# Altium PCB 模拟量.PcbDoc (part 1 of 2)
Units mm, origin at the board's own origin, x right, y up, seen from the top; angles counter-clockwise.
Board outline 122.4 x 87.4 mm, 2 copper layers (Top Layer, Bottom Layer); 86 components, 81 nets, 307 pads, 23 vias.
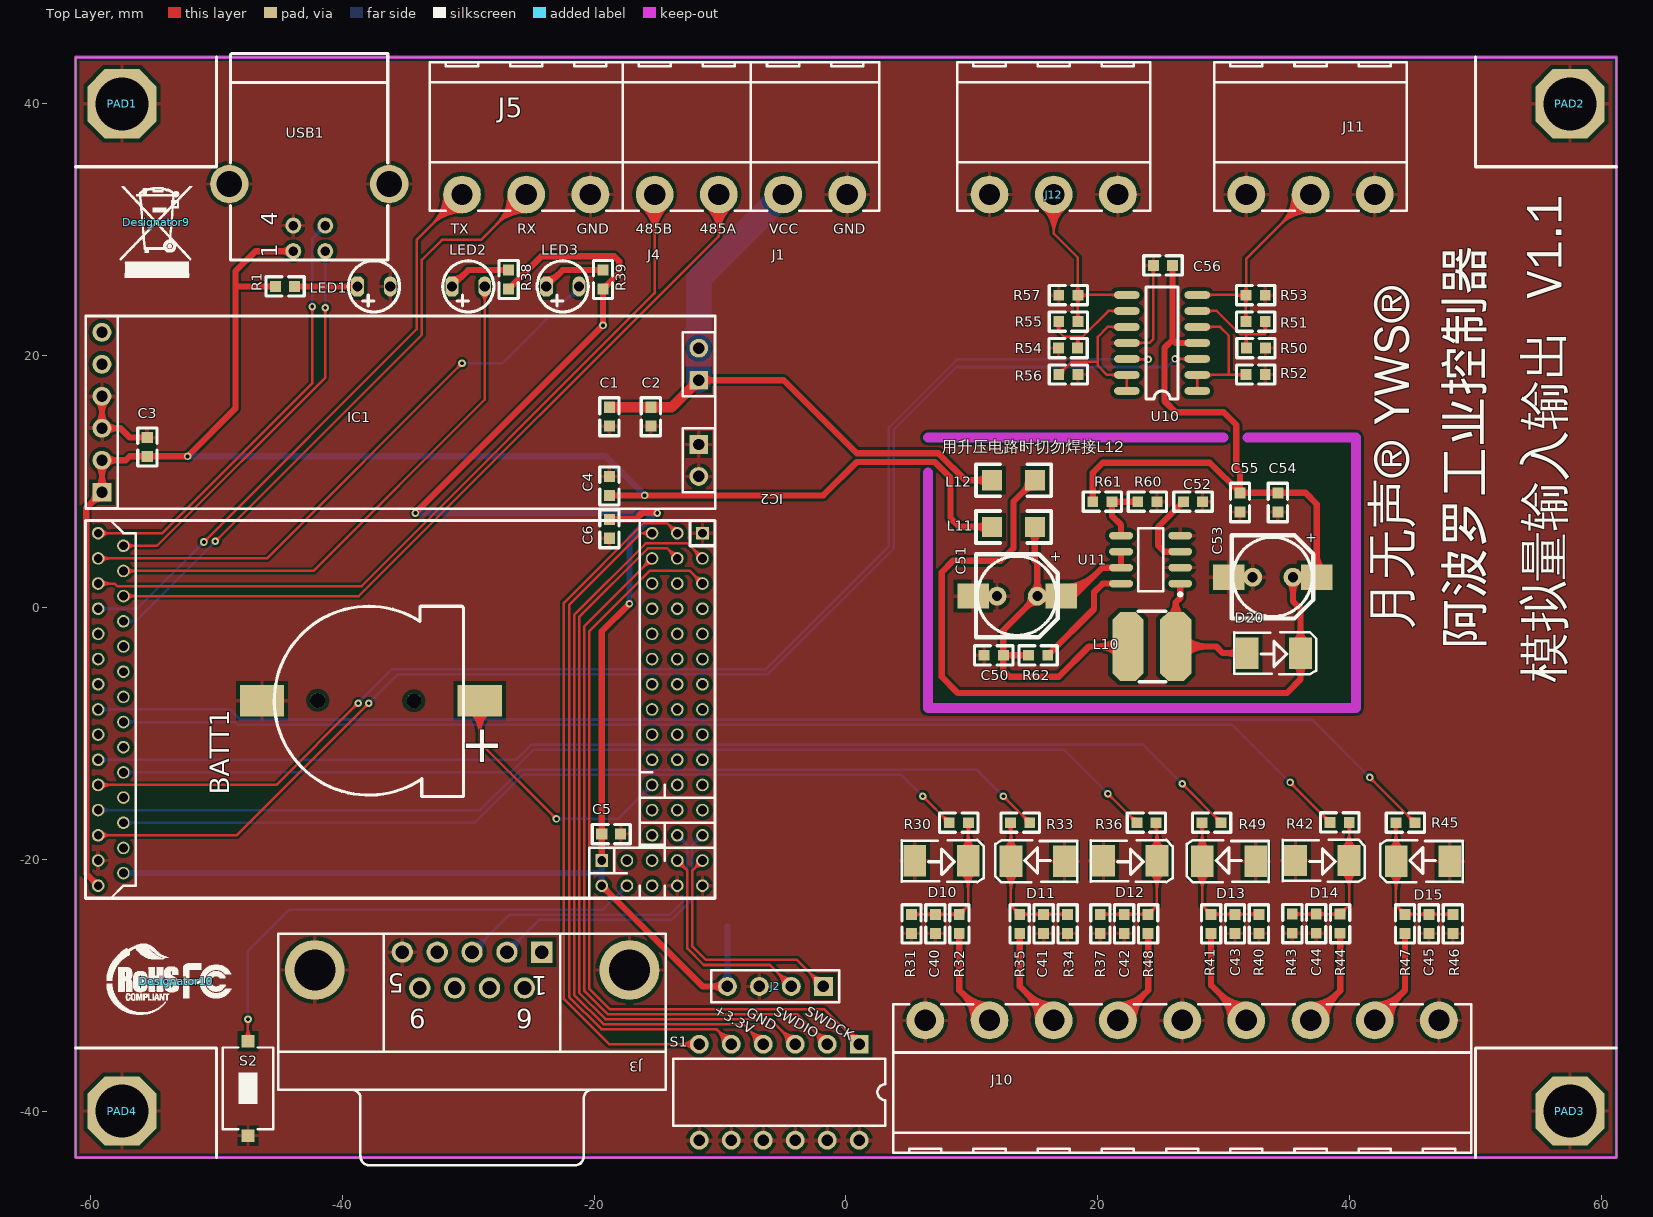
[diagram p0: Top Layer view]
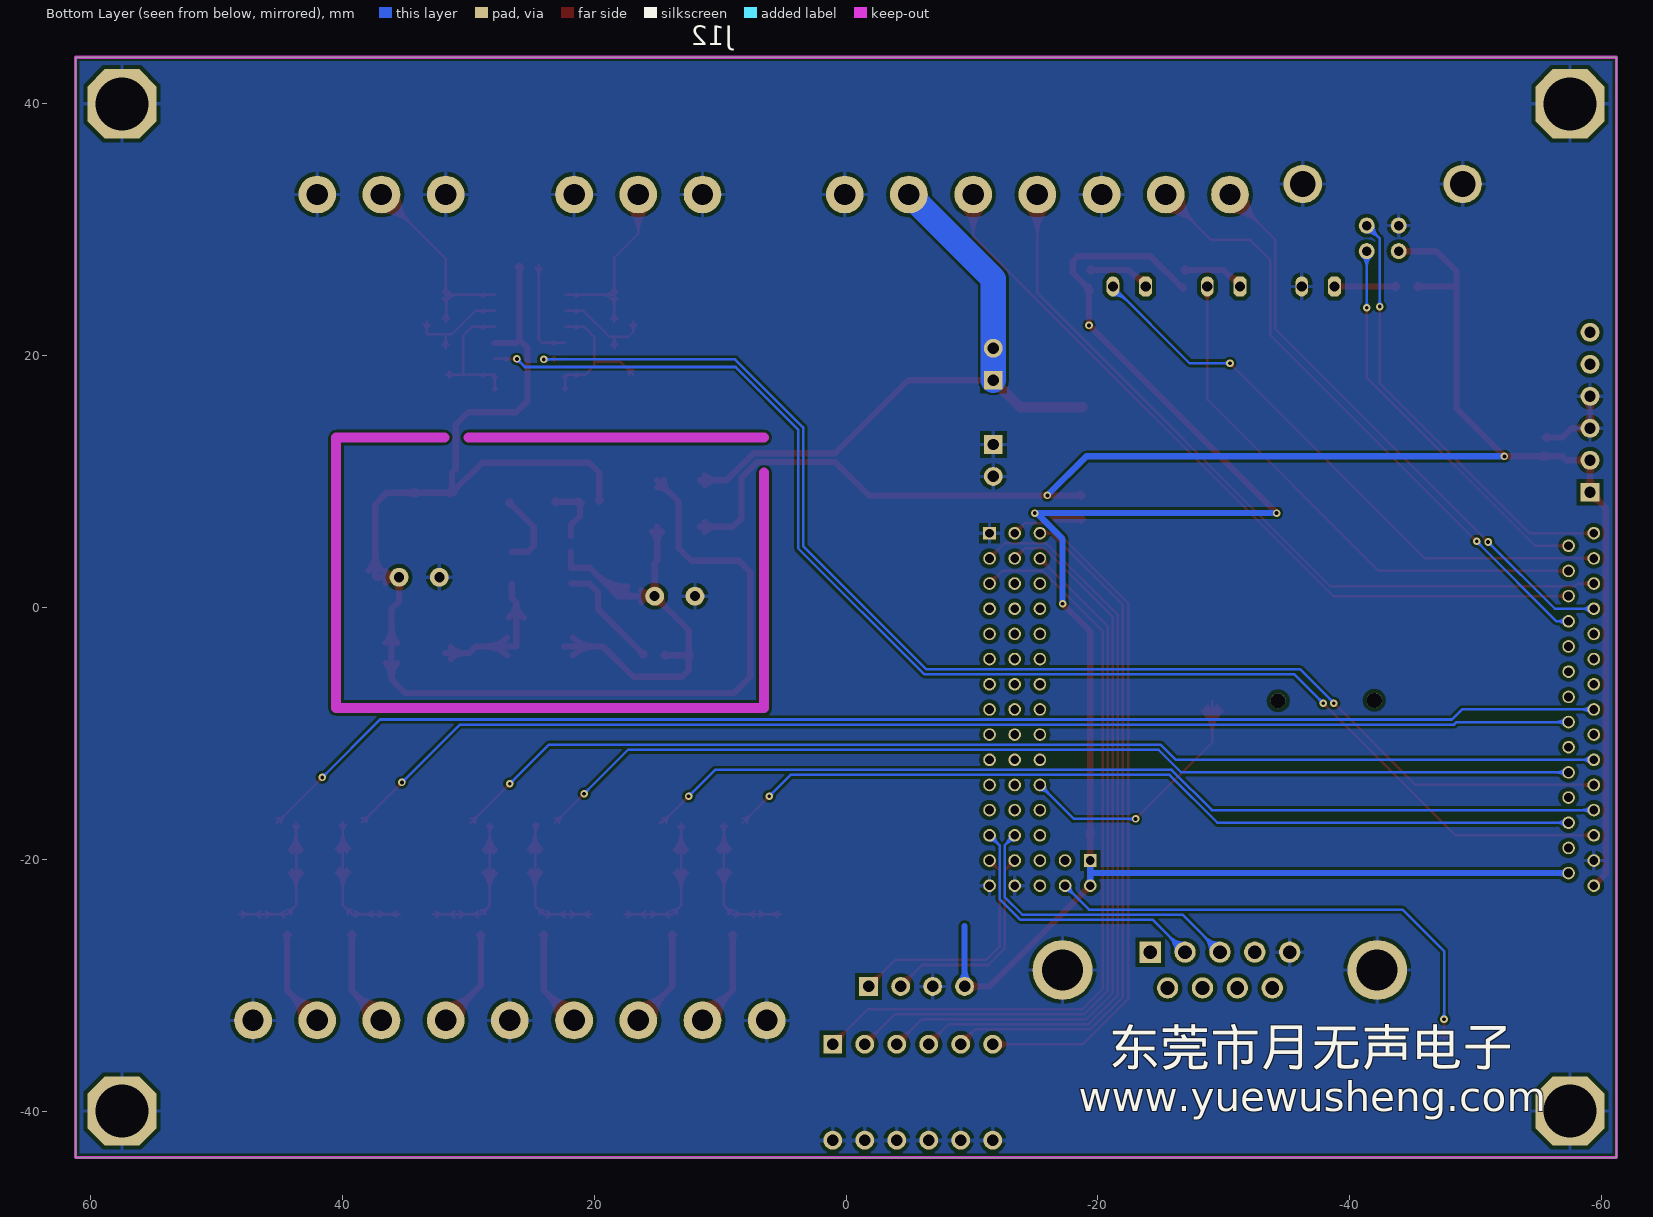
[diagram p1: Bottom Layer view, seen from below]

## Layer stack, top to bottom
Top Layer: signal copper 0.0356
Dielectric: dielectric 0.32, FR-4, Dk 4.8
Bottom Layer: signal copper 0.0356

## Board outline
-61.2,-43.7 61.2,-43.7 61.2,43.7 -61.2,43.7

## Design rules (kind name [scope] priority, off if disabled: settings)
Clearance [(InPadClass('All Pads')) vs InPolygon] p1: gap=0.3
Clearance Clearance_1 [All] p2: gap=0.2
ComponentClearance [All] p1 off: gap=0.254 collisioncheckmode=3 verticalgap=0.254 showdistances=FALSE
PlaneConnect [All] p1: planeconnectstyle=Relief reliefexpansion=0 reliefentries=4 reliefconductorwidth=0.3 reliefairgap=0.508
PolygonConnect PolygonConnect_1 [All vs IsComponentPad] p1: connectstyle=Relief reliefconductorwidth=0.3 reliefentries=4 polygonreliefangle="90 Angle" airgapwidth=0.3
PolygonConnect [All] p2: connectstyle=Direct reliefconductorwidth=0.3 reliefentries=4 polygonreliefangle="90 Angle" airgapwidth=0.3
RoomDefinition 模拟量 [InComponentClass('模拟量')] p1: confinementstyle=ConfineIn formatcopy=TRUE lockcomponents=FALSE outline -12,23.5 -12,28 3.5,28 3.5,46.6 62,46.6 62,-46.8 3.5,-46.8 3.5,-28 -12,-28 -12,-23.5 -9,-23.5 -9,23.5
RoomDefinition 公共电路 [InComponentClass('公共电路')] p2: confinementstyle=ConfineIn formatcopy=TRUE lockcomponents=FALSE outline -62,-44.5 3.5,-44.5 3.5,-43.7 61.2,-43.7 61.2,43.7 50,43.7 50,35 61.2,35 61.2,-35 50,-35 50,-43.7 3.5,-43.7 3.5,-28 -12,-28 -12,-23.5 -9.5,-23.5 -9.5,23.5 -12,23.5 -12,28 3.5,28 3.5,44.5 -62,44.5
RoutingVias [All] p1: holewidth=0.3 width=0.6 viastyle="Through Hole" minholewidth=0.3 minwidth=0.6 maxholewidth=0.3 maxwidth=0.6
SolderMaskExpansion [All] p1: expansion=0.102
Width [All] p1: maxlimit=2 minlimit=0.16 preferedwidth=0.2 minimp=50.000000 maximp=50.000000 favimp=50.000000
26 further rules are at their usual default settings.

## Classes and differential pairs
component class 公共电路: BATT1 C1 C2 C3 C4 C5 C6 Designator9 Designator10 IC1 IC2 J1 J2 J3 J4 J5 LED1 LED2 LED3 PAD1 PAD2 PAD3 PAD4 R1 R38 R39 S1 S2 usb1
component class 模拟量: C40 C41 C42 C43 C44 C45 C50 C51 C52 C53 C54 C55 C56 D10 D11 D12 D13 D14 D15 D20 J10 J11 J12 L10 L11 L12 R30 R31 R32 R33 R34 R35 R36 R37 R40 R41 R42 R43 R44 R45 R46 R47 R48 R49 R50 R51 R52 R53 R54 R55 R56 R57 R60 R61 R62 U10 U11

## Components (designator, comment, footprint, x,y, rotation, side; value= is the part's Value field where it differs from the comment)
BATT1 "XH414H" MINI-BAT -29.1,-7.4 r180 top
C1 "104" 0603A#1 -18.8,15.9 r270 top
C2 "104" 0603A#1 -15.5,15.9 r270 top
C3 "104" 0603A#1 -55.5,12 r90 top
C4 "104" 0603A#1 -18.8,8.9 r90 top
C5 "104" 0603A#1 -19.4,-18 r0 top
C6 "104" 0603A#1 -18.8,7 r270 top
C40 "104" 0603A#2 7.1,-25.9 r90 top
C41 "104" 0603A#2 15.7,-25.9 r90 top
C42 "104" 0603A#2 22.1,-25.9 r90 top
C43 "104" 0603A#2 30.9,-25.9 r90 top
C44 "104" 0603A#2 37.35,-25.875 r90 top
C45 "104" 0603A#2 46.3,-25.9 r90 top
C50 "104" 0603A#2 12.5,-3.8 r180 top
C51 "680UF/50V" 电解电容 13.6,0.9 r0 top
C52 "221" 0603A#2 26.8,8.4 r0 top
C53 "680UF/50V" 电解电容 33.9,2.4 r0 top
C54 "104" 0603A#2 34.3,9.1 r270 top
C55 "104" 0603A#2 31.3,9.1 r270 top
C56 "104" 0603A#2 25.942,27.168 r180 top
D10 "3.6V" 贴片二极管 11,-20.2 r0 top
D11 "5.6V" 贴片二极管 11.8,-20.1 r180 top
D12 "3.6V" 贴片二极管 26,-20.2 r0 top
D13 "3.6V" 贴片二极管 27,-20.1 r180 top
D14 "3.6V" 贴片二极管 41.25,-20.175 r0 top
D15 "3.6V" 贴片二极管 42.4,-20.1 r180 top
D20 "IN5824" 贴片二极管 37.4,-3.7 r0 top
Designator9 "" HS -54.8,30.6 r0 top
Designator10 "" fc -53.2,-29.7 r0 top
IC1 "扩展模块电源板" 扩展模块电源板 -35.4,15.5 r180 top
IC2 "核心板" 核心板 -10.4,6.9 r180 top
J1 "CON2" CON2-5.1卧 0.1,32.8 r0 top
J2 "CON4" HDR1X4 -1.8,-30.1 r180 top
J3 "D Connector 9" DSUB1.385-2H9 -29.7,-38.3 r180 top
J4 "CON2" CON2-5.1卧 -10.1,32.8 r0 top
J5 "CON3" CON3-5.1卧 -20.3,32.8 r0 top
J10 "CON9" CON9-5.1卧 6.3,-32.8 r180 top
J11 "CON3" CON3-5.1卧 42,32.8 r0 top
J12 "CON3" CON3-5.1卧 21.6,32.8 r0 top
L10 "100UH" SMD-50 24.3,-3.1 r180 top
L11 "100UH" 1206C 11.6,6.4 r0 top
L12 "100UH" 1206C 11.6,10.1 r0 top
LED1 "LED" LED2.5 -37.5,25.5 r180 top
LED2 "LED" LED2.5 -30,25.5 r180 top
LED3 "LED" LED2.5 -22.5,25.5 r180 top
PAD1 "PAD" PAD -57.5,40 r0 top
PAD2 "PAD" PAD 57.5,40 r0 top
PAD3 "PAD" PAD 57.5,-40 r0 top
PAD4 "PAD" PAD -57.5,-40 r0 top
R1 "300" 0603A#1 -45.3,25.5 r0 top
R30 "100R" 0603A#2 8.2,-17.1 r0 top
R31 "13K %1" 0603A#2 5.2,-25.9 r90 top
R32 "91K 1%" 0603A#2 9,-25.9 r90 top
R33 "100R" 0603A#2 14.6,-17.1 r180 top
R34 "13K %1" 0603A#2 17.6,-25.9 r90 top
R35 "91K 1%" 0603A#2 13.8,-25.9 r90 top
R36 "100R" 0603A#2 23.1,-17.1 r0 top
R37 "13K %1" 0603A#2 20.2,-25.9 r90 top
R38 "160" 0603A#1 -26.8,25.3 r90 top
R39 "160" 0603A#1 -19.3,25.3 r90 top
R40 "13K %1" 0603A#2 32.8,-25.9 r90 top
R41 "91K 1%" 0603A#2 29,-25.9 r90 top
R42 "100R" 0603A#2 38.45,-17.075 r0 top
R43 "13K %1" 0603A#2 35.45,-25.875 r90 top
R44 "91K 1%" 0603A#2 39.25,-25.875 r90 top
R45 "100R" 0603A#2 45.2,-17.1 r180 top
R46 "13K %1" 0603A#2 48.2,-25.9 r90 top
R47 "91K 1%" 0603A#2 44.4,-25.9 r90 top
R48 "91K 1%" 0603A#2 24,-25.9 r90 top
R49 "100R" 0603A#2 29.8,-17.1 r180 top
R50 "13K %1" 0603A#2 31.8,20.6 r0 top
R51 "91K %1" 0603A#2 33.3,22.7 r180 top
R52 "1K" 0603A#2 31.776,18.5 r0 top
R53 "1K" 0603A#2 33.3,24.8 r180 top
R54 "13K %1" 0603A#2 18.4,20.6 r180 top
R55 "91K %1" 0603A#2 16.9,22.7 r0 top
R56 "1K" 0603A#2 16.9,18.5 r0 top
R57 "1K" 0603A#2 16.9,24.8 r0 top
R60 "2.2k" 0603A#2 24.7,8.4 r180 top
R61 "51k" 0603A#2 19.6,8.4 r0 top
R62 "180R" 0603A#2 14.5,-3.8 r0 top
S1 "SW DIP-6" DIP-12/SW -5.3,-38.5 r180 top
S2 "RESRT" SW-PB2 -47.5,-38.2 r270 top
U10 "LM324" SO-14 25.242,20.668 r180 top
U11 "34063" SO8_L 24.2,3.8 r180 top
USB1 "USB" USB-B3 -43.9,28.3 r90 top

## Footprints (in the part's own frame and the unit in brackets; to place one, negate y for a bottom-side part, rotate by r counter-clockwise, add the part's x,y. Pads: shape width x height; smd on the part's side, far side on the other; paste and mask are expansions set on the pad)
0603A#1 [mm]
  rect 0.88x0.88 smd: 1(0,0) 2(1.5,0)
  silkscreen extent -0.76,-0.76 2.26,0.76
0603A#2 [mm]
  rect 0.864x0.864 smd: 1(0,0) 2(1.524,0)
  silkscreen extent -0.76,-0.76 2.29,0.76
1206C [mm]
  rect 1.6x1.6 smd: 1(0,0) 2(3.4,0)
  silkscreen extent -1.27,-1.27 4.7,1.27
CON2-5.1卧 [mm]
  round 3 hole 1.7: 1(0,0) 2(-5.1,0)
  silkscreen extent -7.65,-1.28 2.55,10.5
CON3-5.1卧 [mm]
  round 3 hole 1.7: 1(0,0) 2(-5.1,0) 3(-10.2,0)
  silkscreen extent -12.75,-1.28 2.55,10.5
CON9-5.1卧 [mm]
  round 3 hole 1.7: 1(0,0) 2(-5.1,0) 3(-10.2,0) 4(-15.3,0) 5(-20.4,0) 6(-25.5,0) 7(-30.6,0) 8(-35.7,0) 9(-40.8,0)
  silkscreen extent -43.35,-1.28 2.55,10.5
DIP-12/SW [mm] "DIP Switch; 12 Leads"
  rect 1.5x1.5 hole 0.9: 1(-6.35,-3.81)
  round 1.5 hole 0.9: 2(-3.81,-3.81) 3(-1.27,-3.81) 4(1.27,-3.81) 5(3.81,-3.81) 6(6.35,-3.81) 7(6.35,3.81) 8(3.81,3.81) 9(1.27,3.81) 10(-1.27,3.81) 11(-3.81,3.81) 12(-6.35,3.81)
  silkscreen extent -8.43,-2.65 8.41,2.65
DSUB1.385-2H9 [mm] "Connector; D Subminiature; 9 Position; Right Angle; Pitch 1.385 mm"
  rect 1.69x1.69 hole 1.09: 1(-5.54,-10.92)
  round 1.69 hole 1.09: 2(-2.77,-10.92) 3(0,-10.92) 4(2.77,-10.92) 5(5.54,-10.92) 6(-4.155,-8.08) 7(-1.385,-8.08) 8(1.385,-8.08) 9(4.155,-8.08)
  round 4.76 hole 3.26: 10(-12.495,-9.5) 11(12.495,-9.5)
  silkscreen extent -15.4,-12.4 15.4,6
fc [mm]
  silkscreen extent -5.53,-2.62 4.36,3
HDR1X4 [mm] "Connector; Header; 4 Position"
  rect 1.5x1.5 hole 0.9: 1(0,0)
  round 1.5 hole 0.9: 2(2.54,0) 3(5.08,0) 4(7.62,0)
  silkscreen extent -1.27,-1.27 8.89,1.27
HS [mm]
  silkscreen extent -2.87,-4.39 2.87,2.87
LED2.5 [mil]
  oct 40x63 hole 32: A(51.18,0)
  oval 40x63 hole 32: K(-51.18,0)
  silkscreen extent -80,-80 80,80
MINI-BAT [mm]
  round 1.2 hole 1.2: 0(5.226,0.017) 0(12.863,-0.02)
  rect 3.5x2.5 smd: 1(-0.01,0.007) 2(17.29,0.007)
  silkscreen extent 1.29,-7.49 16.31,7.61
PAD [mm]
  oct 5.5x5.5 hole 4.2: 1(0,0)
SMD-50 [mm]
  oct 2.5x5.5 smd: 1(-1.9,0) 2(1.9,0)
  silkscreen extent -1.1,-2.8 1.1,2.8
SO8_L [mm] "SOIC, 8-Leads, Body 4.9x3.9mm, Pitch 1.27mm, IPC High Density"
  oval 1.9x0.6 smd: 1(-2.35,1.905) 2(-2.35,0.635) 3(-2.35,-0.635) 4(-2.35,-1.905) 5(2.35,-1.905) 6(2.35,-0.635) 7(2.35,0.635) 8(2.35,1.905)
  silkscreen extent -2.48,-2.5 1,2.88, body extent -2,-2.5 2,2.5, height 1.75
SO-14 [mil]
  oval 80x24 smd: 1(-104.65,136.54) 2(-104.65,86.54) 3(-104.65,36.54) 4(-104.65,-13.46) 5(-104.65,-63.46) 6(-104.65,-113.46) 7(-104.65,-163.46) 8(115.35,-163.46) 9(115.35,-113.46) 10(115.35,-63.46) 11(115.35,-13.46) 12(115.35,36.54) 13(115.35,86.54) 14(115.35,136.54)
  silkscreen extent -45,-188 55,162
SW-PB2 [mm]
  rect 1x1 smd: 1(-3.75,0) 2(3.75,0)
  silkscreen extent -3.25,-2 3.25,2
USB-B3 [mil]
  round 50 hole 30: 1(0,0) 2(0,-100) 3(80,-100) 4(80,0)
  round 120 hole 80: 5(210,200) 6(210,-300)
  silkscreen extent -28,-295 618,197
扩展模块电源板 [mm]
  round 1.5 hole 0.9: 1(-23.7,-5.09) 2(-23.7,5.09) 3(23.7,3.81) 4(23.7,-1.27) 4(23.7,1.27) 5(23.7,-6.35) 5(23.7,-3.81)
  rect 1.5x1.5 hole 0.9: 1(-23.7,-2.55) 2(-23.7,2.55) 3(23.7,6.35)
  silkscreen extent -25,-7.65 25,7.65
核心板 [mm]
  rect 1x1 hole 0.7: 1(1,1) 40(9,27)
  round 1 hole 0.7: 2(3,1) 3(5,1) 4(1,3) 5(3,3) 6(5,3) 7(1,5) 8(3,5) 9(5,5) 10(1,7) 11(3,7) 12(5,7) 13(1,9) 14(3,9) 15(5,9) 16(1,11) 17(3,11) 18(5,11) 19(1,13) 20(3,13) 21(5,13) 22(1,15) 23(3,15) 24(5,15) 25(1,17) 26(3,17) 27(5,17) 28(1,19) 29(3,19) 30(5,19) 31(1,21) 32(3,21) 33(5,21) 34(1,23) 35(3,23) 36(5,23) 37(1,25) 38(3,25) 39(5,25) 41(9,29) 42(7,27) 43(7,29) 44(5,27) 45(5,29) 46(3,27) 47(3,29) 48(1,27) 49(1,29) 50(49,29) 51(47,28) 52(49,27) 53(47,26) 54(49,25) 55(47,24) 56(49,23) 57(47,22) 58(49,21) 59(47,20) 60(49,19) 61(47,18) 62(49,17) 63(47,16) 64(49,15) 65(47,14) 66(49,13) 67(47,12) 68(49,11) 69(47,10) 70(49,9) 71(47,8) 72(49,7) 73(47,6) 74(49,5) 75(47,4) 76(49,3) 77(47,2) 78(49,1)
  silkscreen extent 0,0 50,30
电解电容 [mm]
  round 1.5 hole 0.8: 1(1.6,0) 2(-1.6,0)
  rect 2.5x2 smd: 1(3.5,0) 2(-3.5,0)
  silkscreen extent -3.27,-3.27 3.22,3.33
贴片二极管 [mm]
  rect 1.8x2.5 smd: A(-5.55,0.075) K(-1.3,0.075)
  silkscreen extent -6.58,-1.61 -0.05,1.73

## Part data
BATT1: library part Battery
C1 C2 C3 C4 C5 C6 C50 C52 C54 C55 C56: library part CAP, "Capacitor"
C40 C41 C42 C43 C44 C45: library part Cap_1, "Capacitor"
C51 C53: library part "CAPACITOR POL", "Capacitor"
D10 D11 D12 D13 D14 D15: library part 稳压二极管
D20: library part 肖特基二极管
Designator9 Designator10: library part PAD
J3: "Receptacle Assembly, 9 Position, Right Angle"
L10 L11 L12: library part L1
R1 R38 R39: library part RES2
R30 R31 R32 R33 R34 R35 R36 R37 R40 R41 R42 R43 R44 R45 R46 R47 R48 R49: library part Res2, "Resistor"
R50 R51 R52 R53 R54 R55 R56 R57 R60 R61 R62: library part R
S1: "DIP Switch, 6 Position, SPST"
S2: library part SW-PB
USB1: library part "HEADER 3X2"

## Via types
v1: diameter 0.6, hole 0.3, Top Layer to Bottom Layer, 23 vias

## Nets (pads, with @x,y where several pads share a name; then routed paths per layer and width w, separated by ;. In a path a pad name is that pad's centre, name@x,y a point inside that pad or via, vN(x,y) a via of type N, cw(c..) or ccw(c..) an arc to the next point about the centre after c; other vN are vias at no path point)
485A: IC2.73 J4.1 | length 80
  Top Layer w0.2: IC2.73@-57.4,0.9 -38.7,0.9 -10.1,29.5 ; IC2.73@-57.117,0.617 cw(c-56.434,-0.066) -56.434,0.9 cw(c-56.434,1.866) IC2.73@-57.117,1.183 ; J4.1@-11.073,31.793 cw(c-13.289,29.5) -10.1,29.5 ; J4.1@-10.934,31.937 cw(c-12.833,29.972) -10.1,29.972 cw(c-7.367,29.972) J4.1@-9.266,31.937 ; J4.1@-10.795,32.081 cw(c-12.378,30.443) -10.1,30.443 cw(c-7.822,30.443) J4.1@-9.405,32.081 ; J4.1@-10.656,32.225 cw(c-11.922,30.914) -10.1,30.914 cw(c-8.278,30.914) J4.1@-9.544,32.225 ; J4.1@-10.1,32.8 -10.1,29.5 ; J4.1@-9.127,31.793 ccw(c-6.911,29.5) -10.1,29.5
485B: IC2.74 J4.2 | length 80
  Top Layer w0.2: IC2.74@-59.4,1.9 -58.097,1.9 -57.897,1.7 -38.466,1.7 -15.2,24.966 J4.2@-15.2,32.8 ; IC2.74@-59.117,1.617 cw(c-58.434,0.934) -58.434,1.9 cw(c-58.434,2.866) IC2.74@-59.117,2.183 ; J4.2@-16.19,31.81 cw(c-18.58,29.42) -15.2,29.42 cw(c-11.82,29.42) J4.2@-14.21,31.81 ; J4.2@-16.049,31.951 cw(c-18.097,29.903) -15.2,29.903 cw(c-12.303,29.903) J4.2@-14.351,31.951 ; J4.2@-15.907,32.093 cw(c-17.614,30.386) -15.2,30.386 cw(c-12.786,30.386) J4.2@-14.493,32.093 ; J4.2@-15.766,32.234 cw(c-17.131,30.869) -15.2,30.869 cw(c-13.269,30.869) J4.2@-14.634,32.234
+3.3V: C5.1 C6.1 IC2.40 IC2.41 IC2.51 J2.4 R38.1 R39.1 | length 160
  Top Layer w0.5: v1(-34.2,7.5) v1(-19.3,22.4) R39.1@-19.3,25.3 -19.284,25.3 -18,26.584 -18,27.5 -18.4,27.9 -24.184,27.9 -26.784,25.3 R38.1@-26.8,25.3 ; R38.1@-26.8,25.49 ccw(c-26.8,25.988) R38.1@-26.448,25.636 ; IC2.40@-19.577,-19.923 ccw(c-20.004,-19.496) -19.4,-19.496 ccw(c-18.796,-19.496) IC2.40@-19.223,-19.923 ; C5.1@-19.534,-18.134 cw(c-19.859,-18.459) -19.4,-18.459 cw(c-18.941,-18.459) C5.1@-19.266,-18.134 ; C5.1@-19.534,-17.866 ccw(c-19.859,-17.541) -19.4,-17.541 ccw(c-18.941,-17.541) C5.1@-19.266,-17.866 ; R39.1@-19.434,25.166 cw(c-19.759,24.841) -19.3,24.841 cw(c-18.841,24.841) R39.1@-19.166,25.166 ; IC2.41@-19.4,-22.35 cw(c-19.4,-22.954) -18.973,-22.527 cw(c-18.546,-22.1) IC2.41@-19.15,-22.1 ; IC2.41@-19.4,-22.1 -11.4,-30.1 J2.4@-9.42,-30.1 ; IC2.40@-19.4,-20.1 C5.1@-19.4,-18 -19.4,-1.9 v1(-17.2,0.3) ; R39.1@-19.3,25.49 ccw(c-19.3,25.988) R39.1@-18.948,25.636 ; C6.1@-18.8,7 -16.7,7 -16.2,7.5 v1(-15,7.5) ; C6.1@-18.666,6.866 cw(c-18.341,6.541) -18.341,7 cw(c-18.341,7.459) C6.1@-18.666,7.134 ; J2.4@-9.774,-30.454 ccw(c-10.627,-31.307) -10.627,-30.1 ccw(c-10.627,-28.893) J2.4@-9.774,-29.746
  Bottom Layer w0.5: IC2.51@-57.4,-21.1 -19.4,-21.1 ; IC2.51@-57.223,-21.277 cw(c-56.796,-21.704) -56.796,-21.1 cw(c-56.796,-20.496) IC2.51@-57.223,-20.923 ; v1(-34.2,7.5) v1@-15.144,7.5 ; IC2.41@-19.577,-21.923 ccw(c-20.004,-21.496) -19.4,-21.496 ccw(c-18.796,-21.496) IC2.41@-19.223,-21.923 ; IC2.40@-19.577,-20.277 cw(c-20.004,-20.704) -19.4,-20.704 cw(c-18.796,-20.704) IC2.40@-19.223,-20.277 ; IC2.41@-19.4,-22.1 -19.4,-21.1 ; IC2.40@-19.4,-20.1 -19.4,-21.1 ; v1(-17.2,0.3) -17.2,5.444 v1@-15.144,7.5 ; -15.33,7.313 cw(c-15,6.983) v1@-15,7.45 ; v1(-15,7.5) v1@-15.144,7.5 ; J2.4@-9.774,-29.746 ccw(c-10.627,-28.893) -9.42,-28.893 ccw(c-8.213,-28.893) J2.4@-9.066,-29.746 ; J2.4@-9.42,-30.1 -9.42,-25.3
+5V: C3.1 C4.1 IC1.3 IC2.50 L11.1 R1.1 USB1.1 | length 154.4
  Top Layer w0.5: IC2.50@-59.65,-22.1 ccw(c-60.254,-22.1) -59.827,-21.673 ccw(c-59.4,-21.246) IC2.50@-59.4,-21.85 ; IC1.3@-59.6,9.15 cw(c-60.807,9.15) -59.954,8.296 cw(c-59.1,7.443) IC1.3@-59.1,8.65 ; IC1.3@-59.454,9.504 ccw(c-60.307,10.357) -59.1,10.357 ccw(c-57.893,10.357) IC1.3@-58.746,9.504 ; IC1.3@-59.454,11.336 cw(c-60.307,10.483) -59.1,10.483 cw(c-57.893,10.483) -58.746,11.336 cw(c-57.893,10.483) -57.893,11.69 cw(c-57.893,12.897) IC1.3@-58.746,12.044 ; IC2.50@-59.4,-22.1 -60.35,-21.15 -60.35,7.9 IC1.3@-59.1,9.15 IC1.3@-59.1,11.69 -57.21,11.69 -56.9,12 C3.1@-55.5,12 v1(-52.3,12) -48.5,15.8 -48.5,25.5 ; C3.1@-55.634,11.866 ccw(c-55.959,11.541) -55.959,12 ccw(c-55.959,12.459) C3.1@-55.634,12.134 ; C3.1@-55.366,11.866 cw(c-55.041,11.541) -55.041,12 cw(c-55.041,12.459) C3.1@-55.366,12.134 ; R1.1@-45.434,25.366 ccw(c-45.759,25.041) -45.759,25.5 ccw(c-45.759,25.959) R1.1@-45.434,25.634 ; R1.1@-45.3,25.5 -48.5,25.5 ; USB1.1@-44.172,28.028 ccw(c-44.829,27.371) -44.829,28.3 ccw(c-44.829,29.229) USB1.1@-44.172,28.572 ; USB1.1@-43.9,28.3 -46.9,28.3 -48.5,26.7 -48.5,25.5 ; C4.1@-18.8,8.9 v1(-16,8.9) -1.8,8.9 0.85,11.55 7.05,11.55 8.3,10.3 8.3,7.1 9,6.4 L11.1@11.6,6.4 ; C4.1@-18.666,8.766 cw(c-18.341,8.441) -18.341,8.9 cw(c-18.341,9.359) C4.1@-18.666,9.034 ; L11.1@11.211,6.011 ccw(c10.272,5.072) 10.272,6.4 ccw(c10.272,7.728) L11.1@11.211,6.789
  Bottom Layer w0.5: v1(-52.3,12) -19.1,12 v1(-16,8.9)
+30V: C53.1 C54.1 C55.1 C56.1 D20.K L12.2 R61.1 U10.4 | length 134.3
  Top Layer w0.5: L12.2@14.45,10.1 cw(c13.122,10.1) 14.061,9.161 cw(c15,8.222) L12.2@15,9.55 ; L12.2@15,10.1 13.3,8.4 13.3,4.7 12.3,3.7 8.5,3.7 7.6,2.8 7.6,-5.5 8.9,-6.8 35,-6.8 36.1,-5.7 D20.K@36.1,-3.625 36.1,-0.1 35.5,0.5 C53.1@35.5,2.4 ; R61.1@19.471,8.529 ccw(c19.161,8.839) 19.6,8.839 ccw(c20.039,8.839) R61.1@19.729,8.529 ; R61.1@19.6,8.4 19.6,10.7 20.4,11.5 28.9,11.5 C55.1@31.3,9.1 ; C56.1@25.813,27.039 cw(c25.503,26.729) 25.942,26.729 cw(c26.381,26.729) C56.1@26.071,27.039 ; C56.1@25.942,27.168 25.942,21.258 ; U10.4@27.9,21.01 26.19,21.01 25.942,21.258 ; C55.1@31.118,9.1 ccw(c30.679,9.1) 30.99,9.41 ccw(c31.3,9.721) C55.1@31.3,9.282 ; C55.1@31.171,9.229 ccw(c30.861,9.539) 31.3,9.539 ccw(c31.739,9.539) 31.429,9.229 ccw(c31.739,9.539) 31.739,9.1 ccw(c31.739,8.661) C55.1@31.429,8.971 ; C54.1@34.171,8.971 ccw(c33.861,8.661) 33.861,9.1 ccw(c33.861,9.539) C54.1@34.171,9.229 ; C54.1@34.429,8.971 cw(c34.739,8.661) 34.739,9.1 cw(c34.739,9.539) C54.1@34.429,9.229 ; C53.1@35.146,2.046 cw(c34.293,1.193) 35.5,1.193 cw(c36.707,1.193) 35.854,2.046 cw(c36.707,1.193) 36.707,2.4 cw(c36.707,3.607) C53.1@35.854,2.754 ; D20.K@35.64,-4.435 cw(c34.531,-5.544) 36.1,-5.544 cw(c37.669,-5.544) D20.K@36.56,-4.435 ; D20.K@35.64,-2.815 ccw(c34.531,-1.706) 36.1,-1.706 ccw(c37.669,-1.706) D20.K@36.56,-2.815 ; C53.1@36.585,1.907 ccw(c35.5,0.96) C53.1@35.5,2.4 ; C53.1@36.585,2.893 cw(c35.5,3.84) C53.1@35.5,2.4 ; C53.1@36.87,2.93 ccw(c35.589,4.211) 37.4,4.211 ccw(c39.211,4.211) C53.1@37.93,2.93 ; 25.942,21.258 25.3,20.616 25.3,16.4 26.2,15.5 30,15.5 31,14.5 31,11 31.3,10.7 C55.1@31.3,9.1 ; C55.1@31.3,9.1 C54.1@34.3,9.1 36.5,9.1 37.4,8.2 C53.1@37.4,2.4 C53.1@35.5,2.4
A_IN0: J10.2 R32.1 | length 16.2
  Top Layer w0.5: R32.1@8.871,-26.029 cw(c8.561,-26.339) 9,-26.339 cw(c9.439,-26.339) R32.1@9.129,-26.029 ; R32.1@9,-25.9 9,-30.4 J10.2@11.4,-32.8 ; J10.2@10.15,-32.8 ccw(c7.132,-32.8) 9.266,-30.666 ccw(c11.4,-28.532) J10.2@11.4,-31.55 ; J10.2@10.65,-32.8 ccw(c8.839,-32.8) 10.12,-31.52 ccw(c11.4,-30.239) J10.2@11.4,-32.05
A_IN1: J10.3 R35.1 | length 16.3
  Top Layer w0.5: R35.1@13.671,-26.029 cw(c13.361,-26.339) 13.8,-26.339 cw(c14.239,-26.339) R35.1@13.929,-26.029 ; R35.1@13.8,-25.9 13.8,-30.1 J10.3@16.5,-32.8 ; J10.3@15.25,-32.8 ccw(c12.232,-32.8) 14.366,-30.666 ccw(c16.5,-28.532) J10.3@16.5,-31.55 ; J10.3@15.75,-32.8 ccw(c13.939,-32.8) 15.22,-31.52 ccw(c16.5,-30.239) J10.3@16.5,-32.05
A_IN2: J10.4 R48.1 | length 16.2
  Top Layer w0.5: J10.4@21.6,-32.8 24,-30.4 R48.1@24,-25.9 ; J10.4@21.6,-32.05 ccw(c21.6,-30.239) 22.88,-31.52 ccw(c24.161,-32.8) J10.4@22.35,-32.8 ; J10.4@21.6,-31.55 ccw(c21.6,-28.532) 23.734,-30.666 ccw(c25.868,-32.8) J10.4@22.85,-32.8 ; R48.1@23.871,-26.029 cw(c23.561,-26.339) 24,-26.339 cw(c24.439,-26.339) R48.1@24.129,-26.029
A_IN3: J10.6 R41.1 | length 16.3
  Top Layer w0.5: R41.1@28.871,-26.029 cw(c28.561,-26.339) 29,-26.339 cw(c29.439,-26.339) R41.1@29.129,-26.029 ; R41.1@29,-25.9 29,-30 J10.6@31.8,-32.8 ; J10.6@30.55,-32.8 ccw(c27.532,-32.8) 29.666,-30.666 ccw(c31.8,-28.532) J10.6@31.8,-31.55 ; J10.6@31.05,-32.8 ccw(c29.239,-32.8) 30.52,-31.52 ccw(c31.8,-30.239) J10.6@31.8,-32.05
A_IN4: J10.7 R44.1 | length 16.2
  Top Layer w0.5: J10.7@36.9,-32.8 39.25,-30.45 R44.1@39.25,-25.875 ; J10.7@36.9,-32.05 ccw(c36.9,-30.239) 38.18,-31.52 ccw(c39.461,-32.8) J10.7@37.65,-32.8 ; J10.7@36.9,-31.55 ccw(c36.9,-28.532) 39.034,-30.666 ccw(c41.168,-32.8) J10.7@38.15,-32.8 ; R44.1@39.121,-26.004 cw(c38.811,-26.314) 39.25,-26.314 cw(c39.689,-26.314) R44.1@39.379,-26.004
A_IN5: J10.8 R47.1 | length 16.2
  Top Layer w0.5: J10.8@42,-32.8 44.4,-30.4 R47.1@44.4,-25.9 ; J10.8@42,-32.05 ccw(c42,-30.239) 43.28,-31.52 ccw(c44.561,-32.8) J10.8@42.75,-32.8 ; J10.8@42,-31.55 ccw(c42,-28.532) 44.134,-30.666 ccw(c46.268,-32.8) J10.8@43.25,-32.8 ; R47.1@44.271,-26.029 cw(c43.961,-26.339) 44.4,-26.339 cw(c44.839,-26.339) R47.1@44.529,-26.029
ADC1: IC2.55 R30.1 | length 73
  Top Layer w0.2: v1@6.1,-15.2 cw(c6.1,-15.683) 6.441,-15.341 cw(c6.783,-15) v1@6.3,-15 ; v1(6.1,-15) R30.1@8.2,-17.1 ; R30.1@7.868,-17.1 ccw(c7.067,-17.1) 7.634,-16.534 ccw(c8.2,-15.967) R30.1@8.2,-16.768
  Bottom Layer w0.2: IC2.55@-57.4,-17.1 -29.5,-17.1 -25.7,-13.3 4.4,-13.3 v1(6.1,-15) ; IC2.55@-57.117,-17.383 cw(c-56.434,-18.066) -56.434,-17.1 cw(c-56.434,-16.134) IC2.55@-57.117,-16.817 ; v1@5.9,-15 ccw(c5.417,-15) 5.759,-14.659 ccw(c6.1,-14.317) v1@6.1,-14.8
ADC2: IC2.56 R33.1 | length 81.5
  Top Layer w0.2: v1@12.5,-15.2 cw(c12.5,-15.683) 12.841,-15.341 cw(c13.183,-15) v1@12.7,-15 ; v1(12.5,-15) R33.1@14.6,-17.1 ; R33.1@14.268,-17.1 ccw(c13.467,-17.1) 14.034,-16.534 ccw(c14.6,-15.967) R33.1@14.6,-16.768 ; R33.1@14.7,-17 R33.1@14.8,-17.1
  Bottom Layer w0.2: IC2.56@-59.4,-16.1 -29.066,-16.1 -25.866,-12.9 10.4,-12.9 v1(12.5,-15) ; IC2.56@-59.117,-16.383 cw(c-58.434,-17.066) -58.434,-16.1 cw(c-58.434,-15.134) IC2.56@-59.117,-15.817 ; v1@12.3,-15 ccw(c11.817,-15) 12.159,-14.659 ccw(c12.5,-14.317) v1@12.5,-14.8
ADC3: IC2.59 R36.1 | length 87.9
  Top Layer w0.2: v1@20.8,-15 cw(c20.8,-15.483) 21.141,-15.141 cw(c21.483,-14.8) v1@21,-14.8 ; v1(20.8,-14.8) R36.1@23.1,-17.1 ; R36.1@22.768,-17.1 ccw(c21.967,-17.1) 22.534,-16.534 ccw(c23.1,-15.967) R36.1@23.1,-16.768
  Bottom Layer w0.2: IC2.59@-57.4,-13.1 -26.631,-13.1 -24.831,-11.3 17.3,-11.3 v1(20.8,-14.8) ; IC2.59@-57.117,-13.383 cw(c-56.434,-14.066) -56.434,-13.1 cw(c-56.434,-12.134) IC2.59@-57.117,-12.817 ; v1@20.6,-14.8 ccw(c20.117,-14.8) 20.459,-14.459 ccw(c20.8,-14.117) v1@20.8,-14.6
ADC4: IC2.60 R49.1 | length 96.6
  Top Layer w0.2: v1@26.7,-14.2 cw(c26.7,-14.683) 27.041,-14.341 cw(c27.383,-14) v1@26.9,-14 ; v1(26.7,-14) R49.1@29.8,-17.1 ; R49.1@29.468,-17.1 ccw(c28.667,-17.1) 29.234,-16.534 ccw(c29.8,-15.967) R49.1@29.8,-16.768
  Bottom Layer w0.2: IC2.60@-59.4,-12.1 -26.197,-12.1 -24.997,-10.9 23.6,-10.9 v1(26.7,-14) ; IC2.60@-59.117,-12.383 cw(c-58.434,-13.066) -58.434,-12.1 cw(c-58.434,-11.134) IC2.60@-59.117,-11.817 ; v1@26.5,-14 ccw(c26.017,-14) 26.359,-13.659 ccw(c26.7,-13.317) v1@26.7,-13.8
ADC5: IC2.63 R42.1 | length 103.4
  Top Layer w0.2: v1@35.275,-14.1 cw(c35.275,-14.583) 35.616,-14.241 cw(c35.958,-13.9) v1@35.475,-13.9 ; v1(35.275,-13.9) R42.1@38.45,-17.075 ; R42.1@38.118,-17.075 ccw(c37.317,-17.075) 37.884,-16.509 ccw(c38.45,-15.942) R42.1@38.45,-16.743
  Bottom Layer w0.2: IC2.63@-57.4,-9.1 -48.5,-9.1 -48.3,-9.3 30.675,-9.3 v1(35.275,-13.9) ; IC2.63@-57.117,-9.383 cw(c-56.434,-10.066) -56.434,-9.1 cw(c-56.434,-8.134) IC2.63@-57.117,-8.817 ; v1@35.075,-13.9 ccw(c34.592,-13.9) 34.934,-13.559 ccw(c35.275,-13.217) v1@35.275,-13.7
ADC6: IC2.64 R45.1 | length 112.6
  Top Layer w0.2: v1@41.6,-13.7 cw(c41.6,-14.183) 41.941,-13.841 cw(c42.283,-13.5) v1@41.8,-13.5 ; v1(41.6,-13.5) R45.1@45.2,-17.1 ; R45.1@44.868,-17.1 ccw(c44.067,-17.1) 44.634,-16.534 ccw(c45.2,-15.967) R45.1@45.2,-16.768
  Bottom Layer w0.2: IC2.64@-59.4,-8.1 -48.934,-8.1 -48.134,-8.9 37,-8.9 v1(41.6,-13.5) ; IC2.64@-59.117,-8.383 cw(c-58.434,-9.066) -58.434,-8.1 cw(c-58.434,-7.134) IC2.64@-59.117,-7.817 ; v1@41.4,-13.5 ccw(c40.917,-13.5) 41.259,-13.159 ccw(c41.6,-12.817) v1@41.6,-13.3
ADC7: IC2.67
ADC8: IC2.68
AOUT1: J11.2 R51.2 R53.2 U10.7 | length 38.6
  Top Layer w0.2: U10.7@27.9,24.82 31.756,24.82 31.756,22.72 R51.2@31.776,22.7 ; U10.7@28.756,24.675 cw(c29.106,24.326) 29.106,24.82 cw(c29.106,25.314) U10.7@28.756,24.965 ; 30.927,24.82 cw(c30.927,23.951) 31.541,24.565 cw(c31.023,24.047) 31.756,24.047 ; 31.023,24.82 ccw(c31.023,25.553) 31.541,25.035 ccw(c30.975,25.601) 31.776,25.601 ccw(c32.577,25.601) R53.2@32.011,25.035 ; R51.2@31.541,22.935 ccw(c31.023,23.453) 31.756,23.453 ; 31.756,23.549 ccw(c32.625,23.549) R51.2@32.011,22.935 ; 31.756,23.951 cw(c32.625,23.951) R53.2@32.011,24.565 ; R53.2@31.776,24.8 31.776,27.676 J11.2@36.9,32.8 ; J11.2@35.5,32.8 cw(c32.12,32.8) 34.51,30.41 cw(c36.9,28.02) J11.2@36.9,31.4 ; J11.2@35.7,32.8 cw(c32.803,32.8) 34.851,30.751 cw(c36.9,28.703) J11.2@36.9,31.6 ; J11.2@35.9,32.8 cw(c33.486,32.8) 35.193,31.093 cw(c36.9,29.386) J11.2@36.9,31.8 ; J11.2@36.1,32.8 cw(c34.169,32.8) 35.534,31.434 cw(c36.9,30.069) J11.2@36.9,32
AOUT2: J12.2 R55.2 R57.2 U10.8 | length 35.1
  Top Layer w0.2: J12.2@15.574,31.75 cw(c13.768,29.7) 16.5,29.7 ; J12.2@15.707,31.9 cw(c14.158,30.143) 16.5,30.143 cw(c18.842,30.143) J12.2@17.293,31.9 ; J12.2@15.839,32.05 cw(c14.549,30.586) 16.5,30.586 cw(c18.451,30.586) J12.2@17.161,32.05 ; J12.2@15.971,32.2 cw(c14.939,31.029) 16.5,31.029 cw(c18.061,31.029) J12.2@17.029,32.2 ; J12.2@16.5,32.8 16.5,29.7 ; J12.2@17.426,31.75 ccw(c19.232,29.7) 16.5,29.7 ; R55.2@18.189,22.935 ccw(c17.623,23.501) 18.424,23.501 ccw(c19.225,23.501) R55.2@18.659,22.935 ; R57.2@18.189,24.565 cw(c17.623,23.999) 18.424,23.999 cw(c19.225,23.999) 18.659,24.565 cw(c19.273,23.951) 19.273,24.82 ; R57.2@18.189,25.035 ccw(c17.623,25.601) 18.424,25.601 ccw(c19.225,25.601) 18.659,25.035 ccw(c19.177,25.553) 19.177,24.82 ; R55.2@18.424,22.7 R57.2@18.424,24.8 18.424,27.776 16.5,29.7 ; R57.2@18.444,24.82 U10.8@22.312,24.82 ; U10.8@21.456,24.675 ccw(c21.106,24.326) 21.106,24.82 ccw(c21.106,25.314) U10.8@21.456,24.965
DAC1: IC2.54 U10.3 | length 113.8
  Top Layer w0.2: IC2.54@-59.4,-18.1 -48.4,-18.1 v1(-37.9,-7.6) ; IC2.54@-59.117,-18.383 cw(c-58.434,-19.066) -58.434,-18.1 cw(c-58.434,-17.134) IC2.54@-59.117,-17.817 ; v1@-38.1,-7.6 cw(c-38.583,-7.6) -38.241,-7.941 cw(c-37.9,-8.283) v1@-37.9,-7.8 ; v1(26.14,19.74) U10.3@27.9,19.74 ; v1@26.281,19.599 cw(c26.623,19.257) 26.623,19.74 cw(c26.623,20.223) v1@26.281,19.881 ; U10.3@27.044,19.595 ccw(c26.694,19.246) 26.694,19.74 ccw(c26.694,20.234) U10.3@27.044,19.885
  Bottom Layer w0.2: v1(-37.9,-7.6) -35.6,-5.3 -6.2,-5.3 3.8,4.7 3.8,14.134 8.766,19.1 25.5,19.1 v1(26.14,19.74) ; v1@-37.9,-7.4 ccw(c-37.9,-6.917) -37.559,-7.259 ccw(c-37.217,-7.6) v1@-37.7,-7.6 ; v1@25.94,19.74 cw(c25.457,19.74) 25.799,19.399 cw(c26.14,19.057) v1@26.14,19.54
DAC2: IC2.58 U10.12 | length 110
  Top Layer w0.2: IC2.58@-59.4,-14.1 -45.249,-14.1 v1(-38.749,-7.6) ; IC2.58@-59.117,-14.383 cw(c-58.434,-15.066) -58.434,-14.1 cw(c-58.434,-13.134) IC2.58@-59.117,-13.817 ; v1@-38.949,-7.6 cw(c-39.431,-7.6) -39.09,-7.941 cw(c-38.749,-8.283) v1@-38.749,-7.8 ; U10.12@22.312,19.74 22.352,19.7 v1(24,19.7) ; U10.12@23.168,19.595 cw(c23.421,19.342) 23.421,19.7 ; U10.12@23.168,19.885 ccw(c23.614,20.331) 23.614,19.7 ; v1@23.859,19.559 ccw(c23.517,19.217) 23.517,19.7 ccw(c23.517,20.183) v1@23.859,19.841
  Bottom Layer w0.2: v1(-38.749,-7.6) -36.049,-4.9 -6.366,-4.9 3.4,4.866 3.4,14.3 8.8,19.7 v1(24,19.7) ; v1@-38.749,-7.4 ccw(c-38.749,-6.917) -38.407,-7.259 ccw(c-38.066,-7.6) v1@-38.549,-7.6 ; v1@23.859,19.559 ccw(c23.517,19.217) 23.517,19.7 ccw(c23.517,20.183) v1@23.859,19.841
ERR_LED: IC2.76 LED3.K | length 53.2
  Top Layer w0.2: IC2.76@-59.4,3.9 -46,3.9 v1(-30.5,19.4) ; IC2.76@-59.117,3.617 cw(c-58.434,2.934) -58.434,3.9 cw(c-58.434,4.866) IC2.76@-59.117,4.183 ; v1@-30.7,19.4 cw(c-31.183,19.4) -30.841,19.059 cw(c-30.5,18.717) v1@-30.5,19.2
  Bottom Layer w0.2: v1(-30.5,19.4) -27.3,19.4 LED3.K@-21.2,25.5 ; v1@-30.359,19.259 cw(c-30.017,18.917) -30.017,19.4 cw(c-30.017,19.883) v1@-30.359,19.541 ; -22.395,24.305 cw(c-21.2,23.11) LED3.K@-21.2,24.8 ; -22.054,24.646 cw(c-21.2,23.793) LED3.K@-21.2,25 ; -21.712,24.988 cw(c-21.2,24.475) LED3.K@-21.2,25.2 ; -21.69,25.01 ccw(c-21.888,25.208) LED3.K@-21.608,25.208
GND: BATT1.2 C1.2 C2.2 C3.2 C4.2 C5.2 C6.2 C40.1 C41.1 C42.1 C43.1 C44.1 C45.1 C50.2 C51.2 C52.2 C53.2 C54.2 C55.2 C56.2 D10.A D11.A D12.A D13.A D14.A D15.A IC1.2 IC1.4 IC2.1 IC2.47 IC2.49 IC2.52 J1.1 J2.3 J3.5 J3.10 J3.11 J5.1 J10.1 J10.5 J10.9 J11.1 J11.3 J12.1 J12.3 LED1.K PAD1.1 PAD2.1 PAD3.1 PAD4.1 R31.1 R34.1 R37.1 R40.1 R43.1 R46.1 R50.2 R52.2 R53.1 R54.2 R56.2 R57.1 R60.1 S1.7 S1.8 S1.9 S1.10 S1.11 S1.12 S2.2 U10.11 U11.2 U11.4 USB1.4 USB1.5 USB1.6 | length 23
  Top Layer w0.2: U10.11@22.312,21.01 24.11,21.01 24.418,21.318 C56.2@24.418,27.168 ; U10.11@23.168,20.865 cw(c23.518,20.516) 23.518,21.01 cw(c23.518,21.504) U10.11@23.168,21.155 ; C56.2@24.183,26.933 cw(c23.617,26.367) 24.418,26.367 cw(c25.219,26.367) C56.2@24.653,26.933
  Top Layer w0.5: IC1.4@-59.454,14.584 ccw(c-60.307,15.437) -59.1,15.437 ccw(c-57.893,15.437) -58.746,14.584 ccw(c-57.893,15.437) -57.893,14.23 ccw(c-57.893,13.023) IC1.4@-58.746,13.876 ; IC1.4@-59.454,16.416 cw(c-60.307,15.563) -59.1,15.563 cw(c-57.893,15.563) IC1.4@-58.746,16.416 ; IC1.4@-59.1,16.77 IC1.4@-59.1,14.23 -57.63,14.23 -56.9,13.5 C3.2@-55.5,13.5 ; C3.2@-55.634,13.366 ccw(c-55.959,13.041) -55.959,13.5 ccw(c-55.959,13.959) C3.2@-55.634,13.634
IO1: IC2.9
IO2: IC2.10
IO3: IC2.11
IO4: IC2.12
IO5: IC2.13
IO6: IC2.14
IO7: IC2.15
IO8: IC2.16
IO9: IC2.23
IO10: IC2.24
IO11: IC2.26
IO12: IC2.27
IO13: IC2.28
IO14: IC2.29
IO15: IC2.30
IO16: IC2.31